# Altium PCB STM32.PcbDoc (part 7 of 10)
Units mil, origin at the board's own origin, x right, y up, seen from the top; angles counter-clockwise.
Board outline 3925 x 3925 mil, 2 copper layers (Top Layer, Bottom Layer); 152 components, 142 nets, 670 pads, 189 vias.
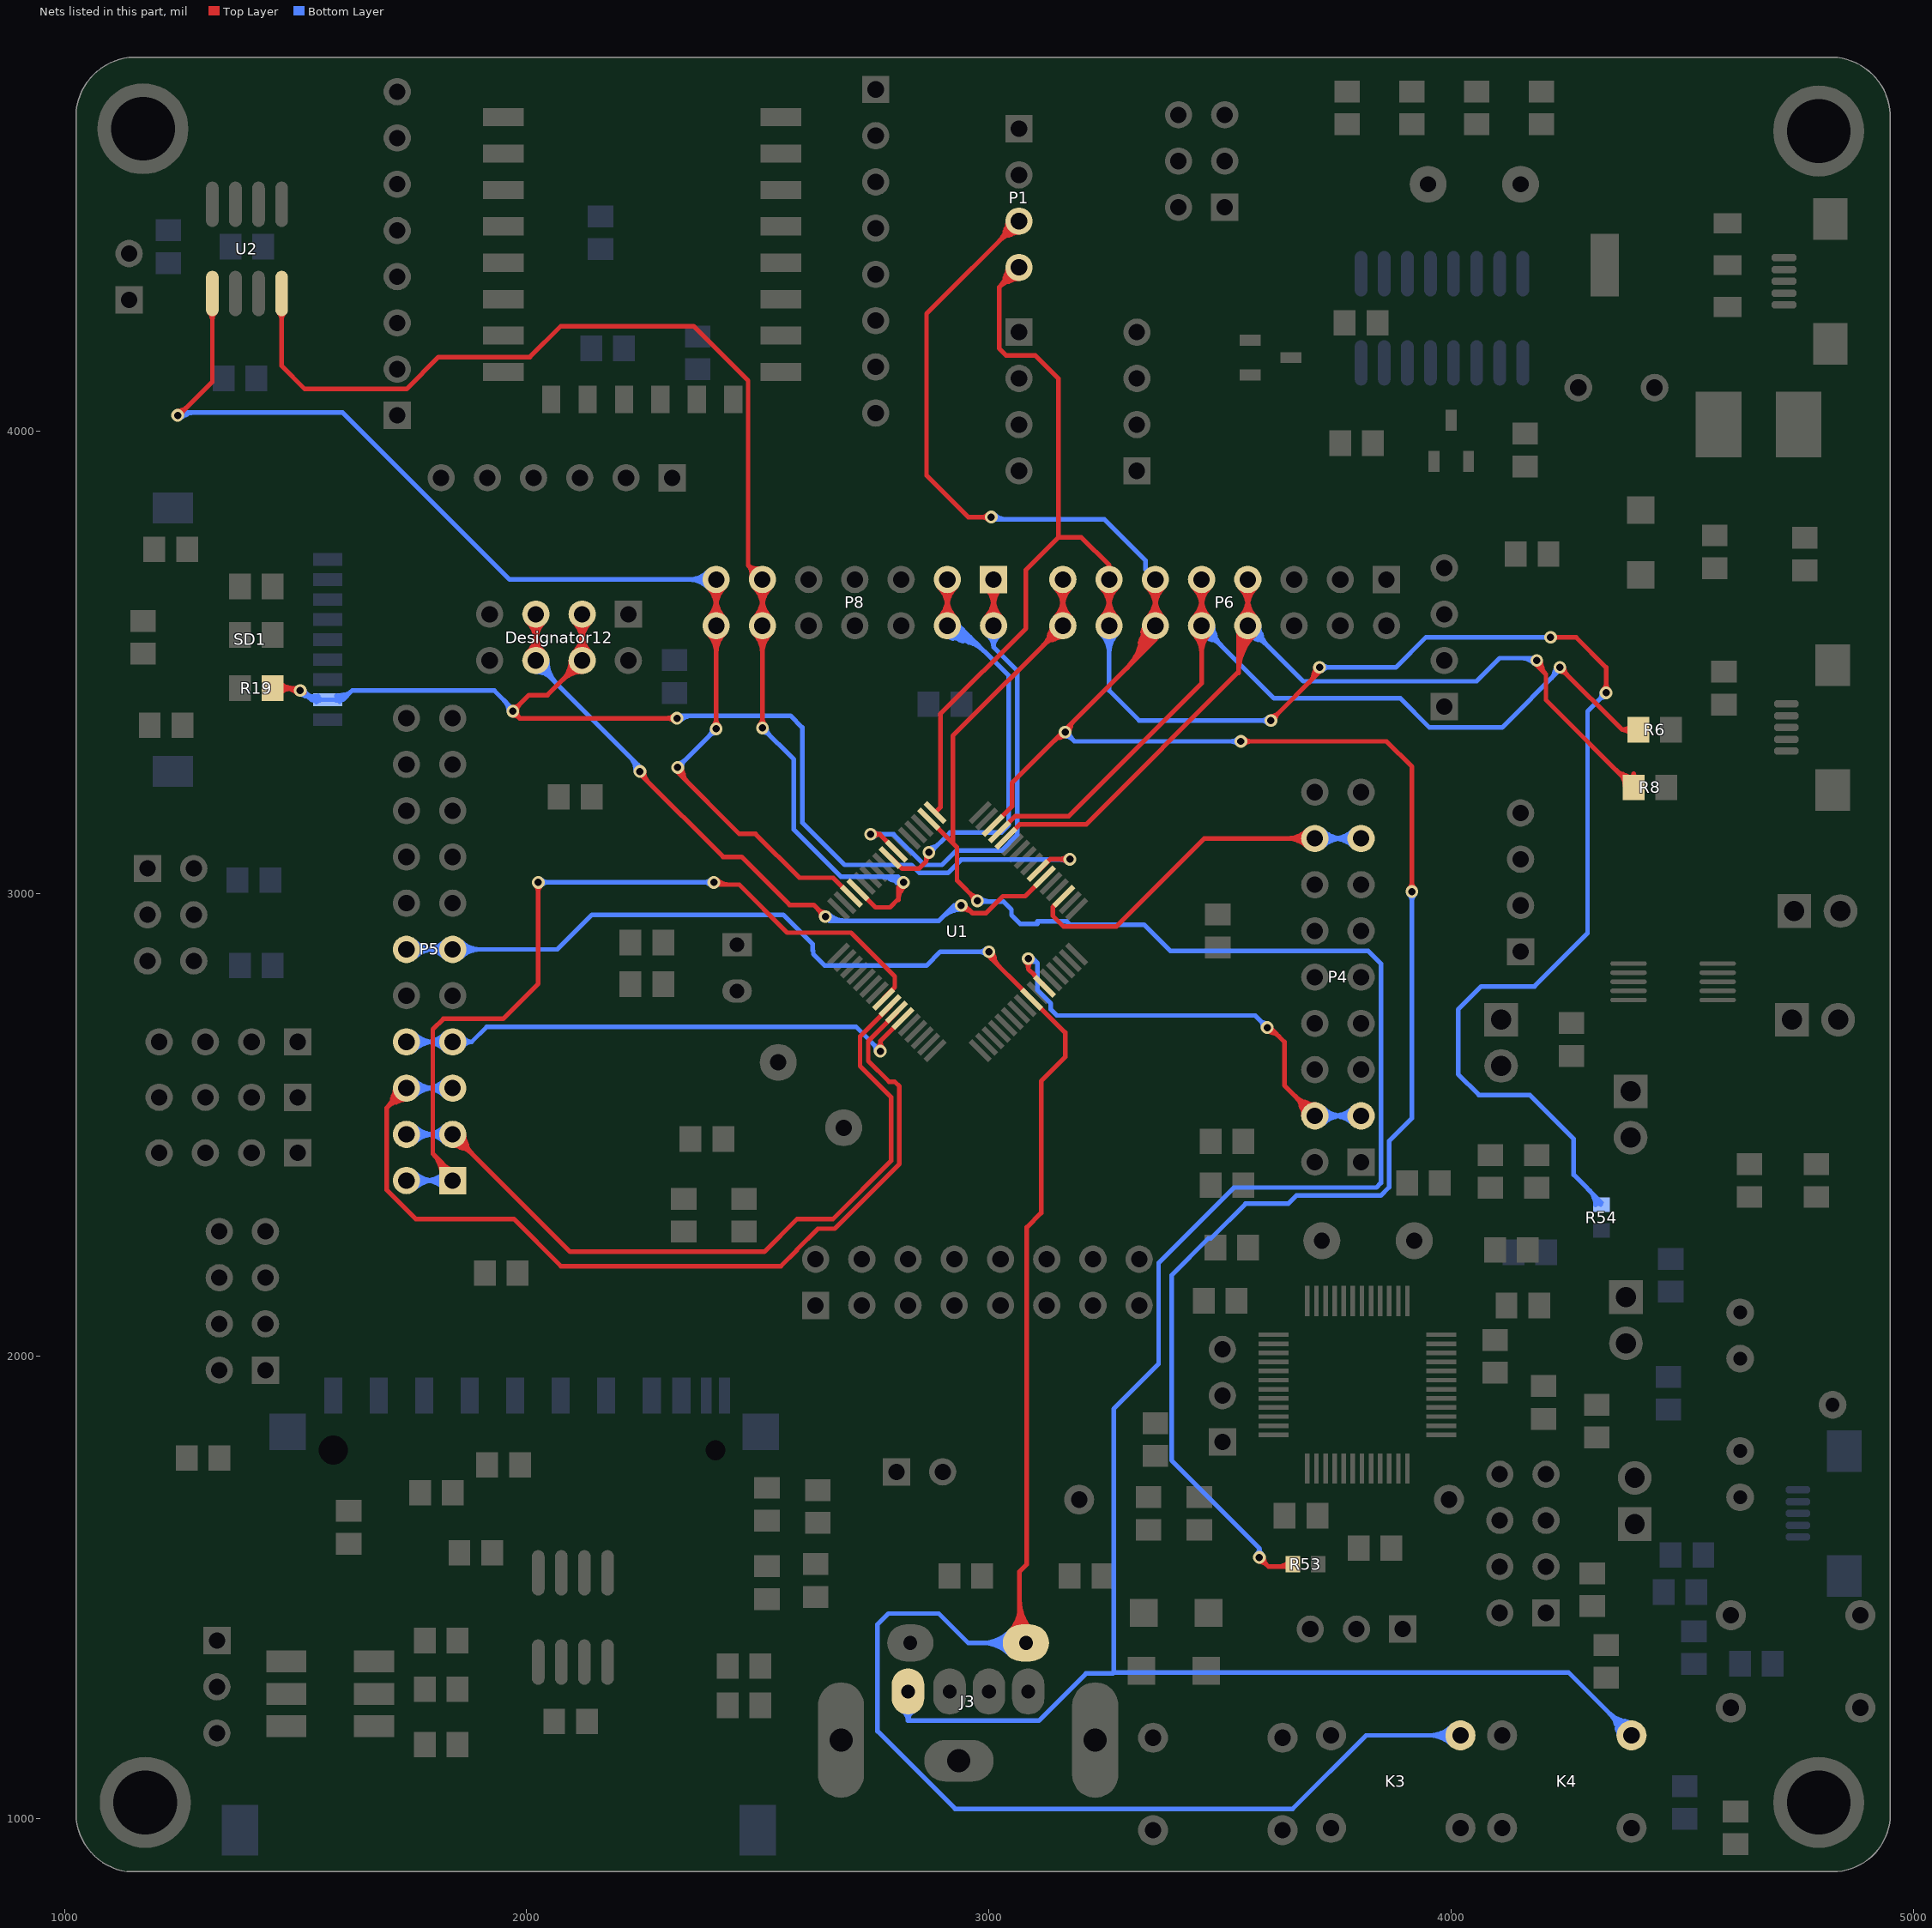
[diagram p7: the nets of this part, all layers, seen from the top]

## Via types
v1: diameter 27.56, hole 15.75, Top Layer to Bottom Layer, tented both sides, 185 vias
v2: diameter 39.37, hole 23.62, Top Layer to Bottom Layer, tented both sides, 3 vias
v3: diameter 39.37, hole 27.56, Top Layer to Bottom Layer, tented both sides, 1 vias

## Nets (pads, with @x,y where several pads share a name; then routed paths per layer and width w, separated by ;. In a path a pad name is that pad's centre, name@x,y a point inside that pad or via, vN(x,y) a via of type N, cw(c..) or ccw(c..) an arc to the next point about the centre after c; other vN are vias at no path point) (continued)
PA11: P6.7 P6.8 R8.1 U1.44 | length 4014.7
  Top Layer w10: U1.44@3036.91,3120.55 3067.1,3150.74 3210.74,3150.74 3540,3480 3540,3580 P6.8@3560,3580 P6.7@3560,3680 ; P6.8@3542.59,3562.73 cw(c3533.49,3553.71) 3544.33,3546.89 cw(c3559.88,3537.11) P6.8@3559.93,3555.47 ; P6.8@3543.79,3561.6 cw(c3529.66,3545.56) 3547.75,3534.18 ; P6.8@3550.4,3569.1 cw(c3537.53,3554.49) 3554.01,3544.12 ; v1@4180,3500 4205,3475 ; v1@4185.67,3506.02 cw(c4171.39,3484.28) 4196.86,3489.56 ; 4371.1,3258.85 cw(c4362,3224.85) R8.1@4395.9,3234.31 ; 3560,3615.07 ccw(c3595.07,3615.07) 3570.27,3590.27 cw(c3595.07,3615.07) 3560,3615.07 ; 3560,3615.07 cw(c3524.93,3615.07) 3549.73,3590.27 ccw(c3524.93,3615.07) 3560,3615.07 ; 3560,3620.79 ccw(c3500.79,3620.79) 3542.66,3662.66 cw(c3500.79,3620.79) 3560,3620.79 ; 3560,3620.79 cw(c3619.21,3620.79) 3577.34,3662.66 ccw(c3619.21,3620.79) 3560,3620.79 ; 3560,3639.21 ccw(c3619.21,3639.21) 3577.34,3597.34 cw(c3619.21,3639.21) 3560,3639.21 ; 3560,3639.21 cw(c3500.79,3639.21) 3542.66,3597.34 ccw(c3500.79,3639.21) 3560,3639.21 ; 3560,3644.93 ccw(c3524.93,3644.93) 3549.73,3669.73 cw(c3524.93,3644.93) 3560,3644.93 ; 3560,3644.93 cw(c3595.07,3644.93) 3570.27,3669.73 ccw(c3595.07,3644.93) 3560,3644.93 ; 4205,3475 cw(c4232.27,3502.28) 4193.76,3504.49 ccw(c4232.27,3502.28) 4205,3475 ; 4205,3475 4205,3419.57 R8.1@4394.57,3230 4394.57,3260 ; 4394.57,3260 ccw(c4403.49,3260) 4400.6,3251.56 cw(c4403.49,3260) 4394.57,3260 ; 4394.57,3260 cw(c4385.64,3260) 4388.54,3251.56 ccw(c4385.64,3260) 4394.57,3260 ; 3540,3478.02 cw(c3654.51,3478.02) 3576.67,3562.01 ccw(c3654.51,3478.02) 3540,3478.02 ; 3540,3500.93 cw(c3633.28,3500.93) 3569.87,3569.34 ccw(c3633.28,3500.93) 3540,3500.93 ; 3540,3523.83 cw(c3612.06,3523.83) 3563.08,3576.68 ccw(c3612.06,3523.83) 3540,3523.83 ; 3540,3546.73 cw(c3590.83,3546.73) 3556.28,3584.01 ccw(c3590.83,3546.73) 3540,3546.73 ; v1@4183.78,3505.07 ccw(c4202.45,3503.99) 4189.23,3490.77 cw(c4202.45,3503.99) v1@4183.78,3505.07 ; 4356.06,3268.51 ccw(c4394.57,3307.02) 4394.57,3252.56 cw(c4394.57,3307.02) 4356.06,3268.51 ; 4365.56,3259.01 cw(c4340.49,3233.94) 4375.95,3233.94 ccw(c4340.49,3233.94) 4365.56,3259.01 ; R8.1@4373.13,3251.44 ccw(c4394.57,3272.88) 4394.57,3242.56 cw(c4394.57,3272.88) R8.1@4373.13,3251.44
  Bottom Layer w10: P6.8@3554.64,3578.9 ccw(c3592.3,3586.61) 3582.35,3549.48 ; P6.8@3560,3580 3680,3460 4055,3460 4105,3510 v1@4185,3510 ; P6.8@3561.1,3585.36 cw(c3553.39,3547.7) 3590.52,3557.65 ; 3584.8,3555.2 ccw(c3560,3530.4) 3560,3565.47 cw(c3560,3530.4) 3584.8,3555.2 ; 3584.8,3555.2 cw(c3609.6,3580) 3574.53,3580 ccw(c3609.6,3580) 3584.8,3555.2 ; 3601.87,3538.13 ccw(c3560,3496.26) 3560,3555.47 cw(c3560,3496.26) 3601.87,3538.13 ; 3601.87,3538.13 cw(c3643.74,3580) 3584.53,3580 ccw(c3643.74,3580) 3601.87,3538.13 ; 4151.73,3510 cw(c4151.73,3471.73) 4178.79,3498.79 ccw(c4151.73,3471.73) 4151.73,3510
  other v1: 4185,3505
PA12: P6.9 P6.10 R6.1 U1.45 | length 3470
  Top Layer w10: U1.45@3022.99,3134.47 3056.74,3168.22 3172.86,3168.22 3460,3455.36 P6.10@3460,3580 P6.9@3460,3680 ; v1@4233.8,3489.76 ccw(c4247.87,3492.64) 4244.15,3478.77 ; v1(4235,3490) 4370,3355 ; v1@4235.24,3491.2 cw(c4232.36,3477.13) 4246.23,3480.85 ; R6.1@4404.57,3355 4370,3355 ; 3460,3520.79 ccw(c3400.79,3520.79) 3442.66,3562.66 cw(c3400.79,3520.79) 3460,3520.79 ; 3460,3520.79 cw(c3519.21,3520.79) 3477.34,3562.66 ccw(c3519.21,3520.79) 3460,3520.79 ; 3460,3544.93 ccw(c3424.93,3544.93) 3449.73,3569.73 cw(c3424.93,3544.93) 3460,3544.93 ; 3460,3544.93 cw(c3495.07,3544.93) 3470.27,3569.73 ccw(c3495.07,3544.93) 3460,3544.93 ; 3460,3615.07 ccw(c3495.07,3615.07) 3470.27,3590.27 cw(c3495.07,3615.07) 3460,3615.07 ; 3460,3615.07 cw(c3424.93,3615.07) 3449.73,3590.27 ccw(c3424.93,3615.07) 3460,3615.07 ; 3460,3620.79 ccw(c3400.79,3620.79) 3442.66,3662.66 cw(c3400.79,3620.79) 3460,3620.79 ; 3460,3620.79 cw(c3519.21,3620.79) 3477.34,3662.66 ccw(c3519.21,3620.79) 3460,3620.79 ; 3460,3639.21 ccw(c3519.21,3639.21) 3477.34,3597.34 cw(c3519.21,3639.21) 3460,3639.21 ; 3460,3639.21 cw(c3400.79,3639.21) 3442.66,3597.34 ccw(c3400.79,3639.21) 3460,3639.21 ; 3460,3644.93 ccw(c3424.93,3644.93) 3449.73,3669.73 cw(c3424.93,3644.93) 3460,3644.93 ; 3460,3644.93 cw(c3495.07,3644.93) 3470.27,3669.73 ccw(c3495.07,3644.93) 3460,3644.93 ; 4249.99,3475.01 ccw(c4235,3460.02) 4235,3481.22 cw(c4235,3460.02) 4249.99,3475.01 ; 4249.99,3475.01 cw(c4264.98,3490) 4243.78,3490 ccw(c4264.98,3490) 4249.99,3475.01 ; 4370,3355 ccw(c4370,3377.78) 4389.02,3365.25 cw(c4370,3377.78) 4370,3355 ; 4370,3355 cw(c4370,3332.23) 4389.02,3344.76 ccw(c4370,3332.23) 4370,3355
  Bottom Layer w10: P6.10@3454.64,3578.9 ccw(c3492.3,3586.61) 3482.35,3549.48 ; P6.10@3460,3580 3617,3423 3890,3423 3953,3360 4110,3360 v1@4237.5,3487.5 ; P6.10@3461.1,3585.36 cw(c3453.39,3547.7) 3490.52,3557.65 ; 4223.09,3478.31 cw(c4241.52,3473.37) v1@4234.55,3491.14 ; 3484.8,3555.2 ccw(c3460,3530.4) 3460,3565.47 cw(c3460,3530.4) 3484.8,3555.2 ; 3484.8,3555.2 cw(c3509.6,3580) 3474.53,3580 ccw(c3509.6,3580) 3484.8,3555.2 ; 3501.87,3538.13 ccw(c3460,3496.26) 3460,3555.47 cw(c3460,3496.26) 3501.87,3538.13 ; 3501.87,3538.13 cw(c3543.74,3580) 3484.53,3580 ccw(c3543.74,3580) 3501.87,3538.13 ; 4216.48,3466.48 ccw(c4192.95,3490) 4226.22,3490 cw(c4192.95,3490) 4216.48,3466.48
PA13: P1.3 P6.11 P6.12 R53.1 U1.46 | length 7716.4
  Top Layer w10: v1(3005,3815) 2955,3815 2865,3905 2865,4255 P1.3@3065,4455 ; U1.46@3009.07,3148.39 3050,3189.32 3050,3240 3360,3550 ; 3034.48,4432.65 cw(c3071.61,4422.7) P1.3@3063.9,4460.36 ; 3042.65,4424.48 ccw(c3032.7,4461.61) P1.3@3070.36,4453.9 ; 3153.31,3338.09 ccw(c3148.37,3356.52) v1@3166.14,3349.55 ; v1@3165.45,3348.86 ccw(c3158.48,3366.63) 3176.91,3361.69 ; 3321.59,3520.38 cw(c3407.44,3500.39) P6.12@3362.32,3576.11 ; 3326.92,3543.27 cw(c3390.74,3528.4) P6.12@3357.2,3584.7 ; 3330.4,3523.75 cw(c3395.16,3506.39) P6.12@3366.26,3566.89 ; 3332.25,3566.16 cw(c3374.05,3556.42) P6.12@3352.08,3593.29 ; 3336.02,3544.71 cw(c3382.85,3532.17) P6.12@3361.95,3575.91 ; P6.12@3338.76,3567.74 cw(c3300.41,3545.59) 3343.18,3534.13 ; 3346.99,3548.35 cw(c3371.52,3541.78) P6.12@3364.19,3566.09 ; P6.11@3360,3680 P6.12@3360,3580 3360,3550 ; v1@3540,3335 v1(3545,3330) 3860,3330 3915,3275 v1(3915,3005) ; v1@3583.8,1564.76 ccw(c3597.87,1567.64) 3594.15,1553.77 ; v1(3585,1565) 3605,1545 R53.1@3657.44,1545 ; v1@3585.24,1566.2 cw(c3582.36,1552.13) 3596.23,1555.85 ; 2983.8,3815 ccw(c2983.8,3836.2) 2998.79,3821.21 cw(c2983.8,3836.2) 2983.8,3815 ; 2983.8,3815 cw(c2983.8,3793.8) 2998.79,3808.79 ccw(c2983.8,3793.8) 2983.8,3815 ; 3023.13,4413.13 ccw(c2981.26,4455) 3040.47,4455 cw(c2981.26,4455) 3023.13,4413.13 ; 3023.13,4413.13 cw(c3065,4371.26) 3065,4430.47 ccw(c3065,4371.26) 3023.13,4413.13 ; 3040.2,4430.2 ccw(c3015.4,4455) 3050.47,4455 cw(c3015.4,4455) 3040.2,4430.2 ; 3040.2,4430.2 cw(c3065,4405.4) 3065,4440.47 ccw(c3065,4405.4) 3040.2,4430.2 ; 3360,3550 ccw(c3353.92,3550) 3355.13,3555.96 cw(c3353.92,3550) 3360,3550 ; 3360,3550 cw(c3366.08,3550) 3364.87,3555.96 ccw(c3366.08,3550) 3360,3550 ; 3360,3615.07 ccw(c3395.07,3615.07) 3370.27,3590.27 cw(c3395.07,3615.07) 3360,3615.07 ; 3360,3615.07 cw(c3324.93,3615.07) 3349.73,3590.27 ccw(c3324.93,3615.07) 3360,3615.07 ; 3360,3620.79 ccw(c3300.79,3620.79) 3342.66,3662.66 cw(c3300.79,3620.79) 3360,3620.79 ; 3360,3620.79 cw(c3419.21,3620.79) 3377.34,3662.66 ccw(c3419.21,3620.79) 3360,3620.79 ; 3360,3639.21 ccw(c3419.21,3639.21) 3377.34,3597.34 cw(c3419.21,3639.21) 3360,3639.21 ; 3360,3639.21 cw(c3300.79,3639.21) 3342.66,3597.34 ccw(c3300.79,3639.21) 3360,3639.21 ; 3360,3644.93 ccw(c3324.93,3644.93) 3349.73,3669.73 cw(c3324.93,3644.93) 3360,3644.93 ; 3360,3644.93 cw(c3395.07,3644.93) 3370.27,3669.73 ccw(c3395.07,3644.93) 3360,3644.93 ; 3566.2,3330 ccw(c3566.2,3308.8) 3551.21,3323.79 cw(c3566.2,3308.8) 3566.2,3330 ; 3566.2,3330 cw(c3566.2,3351.2) 3551.21,3336.21 ccw(c3566.2,3351.2) 3566.2,3330 ; 3599.99,1550.01 ccw(c3585,1535.02) 3585,1556.22 cw(c3585,1535.02) 3599.99,1550.01 ; 3599.99,1550.01 cw(c3614.98,1565) 3593.78,1565 ccw(c3614.98,1565) 3599.99,1550.01 ; 3915,3026.2 ccw(c3936.2,3026.2) 3921.21,3011.21 cw(c3936.2,3026.2) 3915,3026.2 ; 3915,3026.2 cw(c3893.8,3026.2) 3908.79,3011.21 ccw(c3893.8,3026.2) 3915,3026.2 ; 3141.48,3331.48 cw(c3165,3307.95) 3165,3341.22 ccw(c3165,3307.95) 3141.48,3331.48 ; v1@3173.78,3350 cw(c3207.05,3350) 3183.52,3373.52 ccw(c3207.05,3350) v1@3173.78,3350 ; 3296.92,3486.92 ccw(c3203.83,3580) 3335.47,3580 cw(c3203.83,3580) 3296.92,3486.92 ; 3313.99,3503.99 ccw(c3237.97,3580) 3345.47,3580 cw(c3237.97,3580) 3313.99,3503.99 ; 3331.06,3521.06 ccw(c3272.12,3580) 3355.47,3580 cw(c3272.12,3580) 3331.06,3521.06 ; 3348.13,3538.13 ccw(c3306.26,3580) 3365.47,3580 cw(c3306.26,3580) 3348.13,3538.13 ; 3624.17,1545 ccw(c3624.17,1581.3) 3649.84,1555.63 cw(c3624.17,1581.3) 3624.17,1545 ; 3638.81,1545 cw(c3638.81,1529.4) 3649.84,1540.43 ccw(c3638.81,1529.4) 3638.81,1545
  Bottom Layer w10: v1@2999,3810 3249.97,3810 3338.4,3721.58 3338.4,3701.6 P6.11@3360,3680 ; v1(3165,3350) 3185,3330 v1(3545,3330) ; v1(3585,1565) 3585,1585 ; v1(3915,3005) 3915,2515 3865.48,2465.48 3865.48,2365.48 3847.52,2347.52 3665,2347.52 3647.48,2330 3555,2330 3480,2255 3475,2255 3395,2175 3395,1775 3585,1585 ; 3179.99,3335.01 ccw(c3165,3320.02) 3165,3341.22 cw(c3165,3320.02) 3179.99,3335.01 ; 3179.99,3335.01 cw(c3194.98,3350) 3173.78,3350 ccw(c3194.98,3350) 3179.99,3335.01 ; 3523.8,3330 ccw(c3523.8,3351.2) 3538.79,3336.21 cw(c3523.8,3351.2) 3523.8,3330 ; 3523.8,3330 cw(c3523.8,3308.8) 3538.79,3323.79 ccw(c3523.8,3308.8) 3523.8,3330 ; 3585,1585 ccw(c3603.39,1585) 3590.94,1571.46 cw(c3603.39,1585) 3585,1585 ; 3585,1585 cw(c3566.61,1585) 3579.06,1571.46 ccw(c3566.61,1585) 3585,1585 ; 3915,2983.8 ccw(c3893.8,2983.8) 3908.79,2998.79 cw(c3893.8,2983.8) 3915,2983.8 ; 3915,2983.8 cw(c3936.2,2983.8) 3921.21,2998.79 ccw(c3936.2,2983.8) 3915,2983.8 ; v1@3011.21,3821.21 ccw(c3038.27,3848.27) 3038.27,3810 cw(c3038.27,3848.27) v1@3011.21,3821.21
PA14: P1.4 P6.13 P6.14 R54.1 U1.49 | length 6452.8
  Top Layer w10: U1.49@2883.79,3176.23 2895,3187.43 2895,3389.04 3080.18,3574.22 3080.18,3701.18 3150,3771 ; 3034.48,4332.65 cw(c3071.61,4322.7) P1.4@3063.9,4360.36 ; 3042.65,4324.48 ccw(c3032.7,4361.61) P1.4@3070.36,4353.9 ; P1.4@3065,4355 3022,4312 3022,4180 3037,4165 3100,4165 3150,4115 3150,3771 ; P6.14@3260,3580 P6.13@3260,3680 3260,3710.96 ; v1@3608.8,3375.24 cw(c3622.87,3372.36) 3619.15,3386.23 ; v1(3610,3375) 3715,3480 v1(3715,3490) ; v1@3610.24,3373.8 ccw(c3607.36,3387.87) 3621.23,3384.15 ; 3702.41,3475.77 cw(c3726.33,3469.36) v1@3714.41,3491.07 ; v1(4215,3555) 4270,3555 4335,3490 v1(4335,3435) ; 3023.13,4313.13 ccw(c2981.26,4355) 3040.47,4355 cw(c2981.26,4355) 3023.13,4313.13 ; 3023.13,4313.13 cw(c3065,4271.26) 3065,4330.47 ccw(c3065,4271.26) 3023.13,4313.13 ; 3040.2,4330.2 ccw(c3015.4,4355) 3050.47,4355 cw(c3015.4,4355) 3040.2,4330.2 ; 3040.2,4330.2 cw(c3065,4305.4) 3065,4340.47 ccw(c3065,4305.4) 3040.2,4330.2 ; 3150,3771 3199.96,3771 3260,3710.96 ; 3260,3615.07 ccw(c3295.07,3615.07) 3270.27,3590.27 cw(c3295.07,3615.07) 3260,3615.07 ; 3260,3615.07 cw(c3224.93,3615.07) 3249.73,3590.27 ccw(c3224.93,3615.07) 3260,3615.07 ; 3260,3620.79 ccw(c3200.79,3620.79) 3242.66,3662.66 cw(c3200.79,3620.79) 3260,3620.79 ; 3260,3620.79 cw(c3319.21,3620.79) 3277.34,3662.66 ccw(c3319.21,3620.79) 3260,3620.79 ; 3260,3639.21 ccw(c3319.21,3639.21) 3277.34,3597.34 cw(c3319.21,3639.21) 3260,3639.21 ; 3260,3639.21 cw(c3200.79,3639.21) 3242.66,3597.34 ccw(c3200.79,3639.21) 3260,3639.21 ; 3260,3644.93 ccw(c3224.93,3644.93) 3249.73,3669.73 cw(c3224.93,3644.93) 3260,3644.93 ; 3260,3644.93 cw(c3295.07,3644.93) 3270.27,3669.73 ccw(c3295.07,3644.93) 3260,3644.93 ; 3260,3710.96 ccw(c3267.28,3710.96) 3265.61,3703.88 cw(c3267.28,3710.96) 3260,3710.96 ; 3260,3710.96 cw(c3252.72,3710.96) 3254.39,3703.88 ccw(c3252.72,3710.96) 3260,3710.96 ; 3624.99,3389.99 ccw(c3639.98,3375) 3618.78,3375 cw(c3639.98,3375) 3624.99,3389.99 ; 3624.99,3389.99 cw(c3610,3404.98) 3610,3383.78 ccw(c3610,3404.98) 3624.99,3389.99 ; 4335,3456.2 ccw(c4356.2,3456.2) 4341.21,3441.21 cw(c4356.2,3456.2) 4335,3456.2 ; 4335,3456.2 cw(c4313.8,3456.2) 4328.79,3441.21 ccw(c4313.8,3456.2) 4335,3456.2 ; 3692.94,3457.94 ccw(c3660.88,3490) 3706.22,3490 cw(c3660.88,3490) 3692.94,3457.94 ; 3710.01,3475.01 ccw(c3695.02,3490) 3716.22,3490 cw(c3695.02,3490) 3710.01,3475.01
  Bottom Layer w10: P6.14@3260,3580 3260,3440 3325,3375 v1(3610,3375) ; v1(3715,3490) 3880,3490 3945,3555 v1(4215,3555) ; 4307.15,2346.7 ccw(c4333.97,2353.88) R54.1@4323.32,2328.25 ; R54.1@4325,2332.56 4265,2392.56 4265,2470 4170,2565 4060,2565 4015,2610 4015,2750 4065,2800 4180,2800 4295,2915 4295,3395 v1(4335,3435) ; 3260,3520.79 ccw(c3200.79,3520.79) 3242.66,3562.66 cw(c3200.79,3520.79) 3260,3520.79 ; 3260,3520.79 cw(c3319.21,3520.79) 3277.34,3562.66 ccw(c3319.21,3520.79) 3260,3520.79 ; 3260,3544.93 ccw(c3224.93,3544.93) 3249.73,3569.73 cw(c3224.93,3544.93) 3260,3544.93 ; 3260,3544.93 cw(c3295.07,3544.93) 3270.27,3569.73 ccw(c3295.07,3544.93) 3260,3544.93 ; 3588.8,3375 ccw(c3588.8,3396.2) 3603.79,3381.21 cw(c3588.8,3396.2) 3588.8,3375 ; 3588.8,3375 cw(c3588.8,3353.8) 3603.79,3368.79 ccw(c3588.8,3353.8) 3588.8,3375 ; 3736.2,3490 ccw(c3736.2,3468.8) 3721.21,3483.79 cw(c3736.2,3468.8) 3736.2,3490 ; 3736.2,3490 cw(c3736.2,3511.2) 3721.21,3496.21 ccw(c3736.2,3511.2) 3736.2,3490 ; 4320.01,3420.01 ccw(c4305.02,3435) 4326.22,3435 cw(c4305.02,3435) 4320.01,3420.01 ; 4320.01,3420.01 cw(c4335,3405.02) 4335,3426.22 ccw(c4335,3405.02) 4320.01,3420.01 ; 4299.76,2357.8 cw(c4269.51,2327.56) 4312.28,2327.56 ccw(c4269.51,2327.56) 4299.76,2357.8
PA15: J3.5 K4.2 P6.15 P6.16 U1.50 | length 7177.1
  Top Layer w6: U1.50@2869.87,3162.31 U1.50@2890.18,3142
  Top Layer w10: U1.50@2890.18,3142 2920,3112.18 ; v1@2966.22,2985 ccw(c2945.02,2985) 2960.01,2999.99 ccw(c2975,3014.98) v1@2975,2993.78 ; v1(2975,2985) 2931,3029 2931,3101.18 2920,3112.18 ; 3129.48,3557.65 cw(c3166.61,3547.7) P6.16@3158.9,3585.36 ; 3137.65,3549.48 ccw(c3127.7,3586.61) P6.16@3165.36,3578.9 ; P6.15@3160,3680 P6.16@3160,3580 2921.88,3341.88 2921.88,3160 2921.73,3159.85 2921.73,3113.91 2920,3112.18 ; 3118.13,3538.13 ccw(c3076.26,3580) 3135.47,3580 cw(c3076.26,3580) 3118.13,3538.13 ; 3118.13,3538.13 cw(c3160,3496.26) 3160,3555.47 ccw(c3160,3496.26) 3118.13,3538.13 ; 3135.2,3555.2 ccw(c3110.4,3580) 3145.47,3580 cw(c3110.4,3580) 3135.2,3555.2 ; 3135.2,3555.2 cw(c3160,3530.4) 3160,3565.47 ccw(c3160,3530.4) 3135.2,3555.2 ; 3160,3615.07 ccw(c3195.07,3615.07) 3170.27,3590.27 cw(c3195.07,3615.07) 3160,3615.07 ; 3160,3615.07 cw(c3124.93,3615.07) 3149.73,3590.27 ccw(c3124.93,3615.07) 3160,3615.07 ; 3160,3620.79 ccw(c3100.79,3620.79) 3142.66,3662.66 cw(c3100.79,3620.79) 3160,3620.79 ; 3160,3620.79 cw(c3219.21,3620.79) 3177.34,3662.66 ccw(c3219.21,3620.79) 3160,3620.79 ; 3160,3639.21 ccw(c3219.21,3639.21) 3177.34,3597.34 cw(c3219.21,3639.21) 3160,3639.21 ; 3160,3639.21 cw(c3100.79,3639.21) 3142.66,3597.34 ccw(c3100.79,3639.21) 3160,3639.21 ; 3160,3644.93 ccw(c3124.93,3644.93) 3149.73,3669.73 cw(c3124.93,3644.93) 3160,3644.93 ; 3160,3644.93 cw(c3195.07,3644.93) 3170.27,3669.73 ccw(c3195.07,3644.93) 3160,3644.93
  Bottom Layer w10: J3.5@2825,1275 2825,1212 ; v1(2975,2985) 2976.26,2983.74 3031.26,2983.74 3048.74,2966.26 3048.74,2954.12 3067.86,2935 3105,2935 ; v1@2981.21,2978.79 cw(c2993.15,2966.85) 2993.15,2983.74 ; v1@2981.21,2991.21 ccw(c2999.24,3009.24) 2999.24,2983.74 ; 3105,2940.52 3168.26,2940.52 3175.22,2933.56 3335.44,2933.56 3392,2877 3820,2877 3848,2849 3848,2375 3838,2365 3530,2365 3367.01,2202.01 3367.01,1983.28 3270,1886.27 3270,1316 4254,1316 K4.2@4390,1180 ; 3268,1314 3210,1314 3108,1212 2825,1212 ; 4354.22,1210.82 ccw(c4398.76,1222.75) K4.2@4389.51,1177.58 ; 4358.41,1195.19 ccw(c4395.13,1205.02) K4.2@4387.5,1167.78 ; 4359.19,1215.78 cw(c4347.25,1171.25) K4.2@4392.42,1180.5 ; 4374.82,1211.6 cw(c4364.98,1174.88) K4.2@4402.22,1182.5 ; 2825,1212 ccw(c2801.6,1212) 2811.85,1233.03 cw(c2801.6,1212) 2825,1212 ; 2825,1212 cw(c2848.4,1212) 2838.15,1233.03 ccw(c2848.4,1212) 2825,1212 ; 4343.01,1226.99 ccw(c4390,1273.98) 4390,1207.53 cw(c4390,1273.98) 4343.01,1226.99 ; 4343.01,1226.99 cw(c4296.02,1180) 4362.47,1180 ccw(c4296.02,1180) 4343.01,1226.99 ; 4360.08,1209.92 ccw(c4390,1239.84) 4390,1197.53 cw(c4390,1239.84) 4360.08,1209.92 ; 4360.08,1209.92 cw(c4330.16,1180) 4372.47,1180 ccw(c4330.16,1180) 4360.08,1209.92
PB1: P4.3 P4.4 U1.27 | length 2242.4
  Top Layer w6: U1.27@3120.42,2800.4 U1.27@3117.86,2800.4 ; U1.27@3117.86,2800.4 3117.86,2807.49 U1.27@3117.86,2800.4
  Top Layer w10: v1@3085,2862 3085,2837.53 3098.59,2823.94 ; v1@3600.88,2710.52 ccw(c3619.41,2718.41) 3614.2,2698.95 ; v1(3602,2711) 3608,2711 3639,2680 3639,2586 P4.4@3705,2520 ; 3674.48,2542.35 ccw(c3711.61,2552.3) P4.4@3703.9,2514.64 ; 3682.65,2550.52 cw(c3672.7,2513.39) P4.4@3710.36,2521.1 ; 3085,2838.8 ccw(c3063.8,2838.8) 3078.79,2853.79 cw(c3063.8,2838.8) 3085,2838.8 ; 3085,2838.8 cw(c3106.2,2838.8) 3091.21,2853.79 ccw(c3106.2,2838.8) 3085,2838.8 ; 3663.13,2561.87 ccw(c3705,2603.74) 3705,2544.53 cw(c3705,2603.74) 3663.13,2561.87 ; 3663.13,2561.87 cw(c3621.26,2520) 3680.47,2520 ccw(c3621.26,2520) 3663.13,2561.87 ; 3680.2,2544.8 ccw(c3705,2569.6) 3705,2534.53 cw(c3705,2569.6) 3680.2,2544.8 ; 3680.2,2544.8 cw(c3655.4,2520) 3690.47,2520 ccw(c3655.4,2520) 3680.2,2544.8 ; v1@3602,2702.22 cw(c3602,2666.54) 3627.23,2691.77 ccw(c3602,2666.54) v1@3602,2702.22
  Bottom Layer w10: v1(3602,2711) 3576,2737 3146.74,2737 3133.74,2750 3133.74,2763 3105,2791.74 3105,2850 ; P4.4@3705,2520 P4.3@3805,2520 ; v1@3093,2862 3085,2862 v1@3093,2862 ; v1@3093,2862 3105,2850 ; 3105,2850 ccw(c3095.57,2840.57) 3089.19,2852.29 cw(c3095.57,2840.57) 3105,2850 ; 3587.01,2725.99 ccw(c3602,2740.98) 3602,2719.78 cw(c3602,2740.98) 3587.01,2725.99 ; 3587.01,2725.99 cw(c3572.02,2711) 3593.22,2711 ccw(c3572.02,2711) 3587.01,2725.99 ; 3740.07,2520 ccw(c3740.07,2484.93) 3715.27,2509.73 cw(c3740.07,2484.93) 3740.07,2520 ; 3740.07,2520 cw(c3740.07,2555.07) 3715.27,2530.27 ccw(c3740.07,2555.07) 3740.07,2520 ; 3745.79,2520 ccw(c3745.79,2579.21) 3787.66,2537.34 cw(c3745.79,2579.21) 3745.79,2520 ; 3745.79,2520 cw(c3745.79,2460.79) 3787.66,2502.66 ccw(c3745.79,2460.79) 3745.79,2520 ; 3764.21,2520 ccw(c3764.21,2460.79) 3722.34,2502.66 cw(c3764.21,2460.79) 3764.21,2520 ; 3764.21,2520 cw(c3764.21,2579.21) 3722.34,2537.34 ccw(c3764.21,2579.21) 3764.21,2520 ; 3769.93,2520 ccw(c3769.93,2555.07) 3794.73,2530.27 cw(c3769.93,2555.07) 3769.93,2520 ; 3769.93,2520 cw(c3769.93,2484.93) 3794.73,2509.73 ccw(c3769.93,2484.93) 3769.93,2520
  other v1: 3085,2860
PB3: P8.1 P8.2 U1.55 | length 1856.8
  Top Layer w10: v1(2744,3129) 2763.99,3129 ; U1.55@2800.28,3092.71 2763.99,3129 ; P8.2@3010,3580 P8.1@3010,3680 ; 2763.99,3129 ccw(c2763.99,3110.64) 2750.47,3123.06 cw(c2763.99,3110.64) 2763.99,3129 ; 2763.99,3129 cw(c2763.99,3147.36) 2750.47,3134.94 ccw(c2763.99,3147.36) 2763.99,3129 ; 3010,3615.07 ccw(c3045.07,3615.07) 3020.27,3590.27 cw(c3045.07,3615.07) 3010,3615.07 ; 3010,3615.07 cw(c2974.93,3615.07) 2999.73,3590.27 ccw(c2974.93,3615.07) 3010,3615.07 ; 3010,3620.79 ccw(c2950.79,3620.79) 2992.66,3662.66 cw(c2950.79,3620.79) 3010,3620.79 ; 3010,3620.79 cw(c3069.21,3620.79) 3027.34,3662.66 ccw(c3069.21,3620.79) 3010,3620.79 ; 3010,3639.21 ccw(c3069.21,3639.21) 3027.34,3597.34 cw(c3069.21,3639.21) 3010,3639.21 ; 3010,3639.21 cw(c2950.79,3639.21) 2992.66,3597.34 ccw(c2950.79,3639.21) 3010,3639.21 ; 3010,3644.93 ccw(c2974.93,3644.93) 2999.73,3669.73 cw(c2974.93,3644.93) 3010,3644.93 ; 3010,3644.93 cw(c3045.07,3644.93) 3020.27,3669.73 ccw(c3045.07,3644.93) 3010,3644.93
  Bottom Layer w10: v1(2744,3129) 2793.74,3129 2860,3062.74 2898,3062.74 2929,3093.74 3027,3093.74 3061,3127.74 3061,3483 3010,3534 ; P8.2@3010,3580 3010,3534 ; 2765.2,3129 ccw(c2765.2,3107.8) 2750.21,3122.79 cw(c2765.2,3107.8) 2765.2,3129 ; 2765.2,3129 cw(c2765.2,3150.2) 2750.21,3135.21 ccw(c2765.2,3150.2) 2765.2,3129 ; 3010,3534 ccw(c2979.13,3534) 2996.33,3559.63 cw(c2979.13,3534) 3010,3534 ; 3010,3534 cw(c3040.87,3534) 3023.67,3559.63 ccw(c3040.87,3534) 3010,3534
PB4: P8.3 P8.4 U1.56 | length 2422.5
  Top Layer w10: U1.56@2786.36,3078.79 2788.06,3078.79 2812.08,3054.77 2848.23,3054.77 2864,3070.55 v1@2864,3089 ; P8.4@2910,3580 P8.3@2910,3680 ; v1@2864,3089 2872,3089 v1@2864,3089 ; 2910,3615.07 ccw(c2945.07,3615.07) 2920.27,3590.27 cw(c2945.07,3615.07) 2910,3615.07 ; 2910,3615.07 cw(c2874.93,3615.07) 2899.73,3590.27 ccw(c2874.93,3615.07) 2910,3615.07 ; 2910,3620.79 ccw(c2850.79,3620.79) 2892.66,3662.66 cw(c2850.79,3620.79) 2910,3620.79 ; 2910,3620.79 cw(c2969.21,3620.79) 2927.34,3662.66 ccw(c2969.21,3620.79) 2910,3620.79 ; 2910,3639.21 ccw(c2969.21,3639.21) 2927.34,3597.34 cw(c2969.21,3639.21) 2910,3639.21 ; 2910,3639.21 cw(c2850.79,3639.21) 2892.66,3597.34 ccw(c2850.79,3639.21) 2910,3639.21 ; 2910,3644.93 ccw(c2874.93,3644.93) 2899.73,3669.73 cw(c2874.93,3644.93) 2910,3644.93 ; 2910,3644.93 cw(c2945.07,3644.93) 2920.27,3669.73 ccw(c2945.07,3644.93) 2910,3644.93 ; 2864,3069.64 cw(c2876.63,3069.64) 2872.72,3081.65 ccw(c2876.63,3069.64) 2864,3069.64
  Bottom Layer w10: v1@2868.84,3090.37 cw(c2885.1,3085.14) 2880.68,3101.64 ; v1@2872,3089 2915.67,3132.67 3026.67,3132.67 3043,3149 3043,3472 2935,3580 P8.4@2910,3580 ; P8.4@2896.3,3572.81 ccw(c2932.29,3591.69) 2922.13,3552.34 ; P8.4@2905.15,3577.46 ccw(c2959.22,3605.82) 2943.96,3546.71 ; P8.4@2914.01,3582.1 ccw(c2986.14,3619.95) 2965.79,3541.08 ; P8.4@2914.2,3581.7 ccw(c2953.3,3597.56) 2942.38,3556.8 ; P8.4@2923.46,3585.46 ccw(c2976.63,3607.02) 2961.78,3551.6 ; P8.4@2924.29,3582.6 ccw(c2942.49,3585.92) 2937.7,3568.05 ; v1@2870,3098.78 ccw(c2870,3127.22) 2890.11,3107.11 cw(c2870,3127.22) v1@2870,3098.78 ; v1@2878.78,3090 cw(c2892.73,3090) 2882.87,3099.87 ccw(c2892.73,3090) v1@2878.78,3090 ; P8.4@2910,3555.47 cw(c2910,3435.9) 2994.55,3520.45 ccw(c2910,3435.9) P8.4@2910,3555.47 ; P8.4@2910,3565.47 cw(c2910,3470.04) 2977.48,3537.52 ccw(c2910,3470.04) P8.4@2910,3565.47 ; P8.4@2910,3575.47 cw(c2910,3504.19) 2960.41,3554.59 ccw(c2910,3504.19) P8.4@2910,3575.47 ; P8.4@2910,3585.47 cw(c2910,3538.33) 2943.34,3571.66 ccw(c2910,3538.33) P8.4@2910,3585.47
  other v1: 2870,3090
PB8: P8.11 P8.12 U1.61 U2.4 | length 4406.8
  Top Layer w10: U2.4@1470,4298.54 1470,4142 1520,4092 1740,4092 1809,4161 2007,4161 2074,4228 2361,4228 2479,4110 2479,3711 ; 2485.78,3699.2 ccw(c2529.3,3700.37) P8.11@2499.36,3668.77 ; 2490.8,3704.22 cw(c2489.63,3660.7) P8.11@2521.23,3690.64 ; v1(2510,3359) P8.12@2510,3580 P8.11@2510,3680 2479,3711 ; U1.61@2716.76,3009.19 2755,2970.95 2785.95,2970.95 2804,2989 2804,3014 ; v1@2808.38,3019.23 cw(c2799.74,3011.7) 2808.46,3004.26 ; v1(2815,3025) 2804,3014 ; 1470,4241.92 ccw(c1448.8,4241.92) 1463.79,4256.9 cw(c1448.8,4241.92) 1470,4241.92 ; 1470,4241.92 cw(c1491.2,4241.92) 1476.21,4256.9 ccw(c1491.2,4241.92) 1470,4241.92 ; 2479,3711 ccw(c2498.03,3730.03) 2504.29,3703.85 cw(c2498.03,3730.03) 2479,3711 ; 2479,3711 cw(c2459.97,3691.97) 2486.15,3685.71 ccw(c2459.97,3691.97) 2479,3711 ; 2510,3380.2 ccw(c2531.2,3380.2) 2516.21,3365.21 cw(c2531.2,3380.2) 2510,3380.2 ; 2510,3380.2 cw(c2488.8,3380.2) 2503.79,3365.21 ccw(c2488.8,3380.2) 2510,3380.2 ; 2510,3520.79 ccw(c2450.79,3520.79) 2492.66,3562.66 cw(c2450.79,3520.79) 2510,3520.79 ; 2510,3520.79 cw(c2569.21,3520.79) 2527.34,3562.66 ccw(c2569.21,3520.79) 2510,3520.79 ; 2510,3544.93 ccw(c2474.93,3544.93) 2499.73,3569.73 cw(c2474.93,3544.93) 2510,3544.93 ; 2510,3544.93 cw(c2545.07,3544.93) 2520.27,3569.73 ccw(c2545.07,3544.93) 2510,3544.93 ; 2510,3615.07 ccw(c2545.07,3615.07) 2520.27,3590.27 cw(c2545.07,3615.07) 2510,3615.07 ; 2510,3615.07 cw(c2474.93,3615.07) 2499.73,3590.27 ccw(c2474.93,3615.07) 2510,3615.07 ; 2510,3620.79 ccw(c2450.79,3620.79) 2492.66,3662.66 cw(c2450.79,3620.79) 2510,3620.79 ; 2510,3620.79 cw(c2569.21,3620.79) 2527.34,3662.66 ccw(c2569.21,3620.79) 2510,3620.79 ; 2510,3639.21 ccw(c2569.21,3639.21) 2527.34,3597.34 cw(c2569.21,3639.21) 2510,3639.21 ; 2510,3639.21 cw(c2450.79,3639.21) 2492.66,3597.34 ccw(c2450.79,3639.21) 2510,3639.21 ; 2510,3644.93 ccw(c2474.93,3644.93) 2499.73,3669.73 cw(c2474.93,3644.93) 2510,3644.93 ; 2510,3644.93 cw(c2545.07,3644.93) 2520.27,3669.73 ccw(c2545.07,3644.93) 2510,3644.93 ; 2804,3014 ccw(c2797.36,3020.64) 2806.48,3022.89 cw(c2797.36,3020.64) 2804,3014 ; 2804,3014 cw(c2810.64,3007.36) 2812.89,3016.48 ccw(c2810.64,3007.36) 2804,3014 ; 2804,2987.36 cw(c2840.93,2987.36) 2819.98,3017.77 ccw(c2840.93,2987.36) 2804,2987.36 ; 2804,3006.39 cw(c2827.82,3006.39) 2814.31,3026.01 ccw(c2827.82,3006.39) 2804,3006.39
  Bottom Layer w10: v1(2510,3359) 2578,3291 2578,3139 2680,3037 2803,3037 v1(2815,3025) ; 2785.16,3032.43 ccw(c2797.74,3054.22) v1@2810.53,3032.56 ; 2798.23,3036.04 cw(c2790.04,3021.86) v1@2806.29,3023.9 ; 2799.7,3035.2 ccw(c2808.28,3050.07) v1@2812.73,3033.48 ; 2799.99,3023.87 ccw(c2807.74,3037.29) v1@2815.62,3023.95 ; 2524.99,3344.01 ccw(c2510,3329.02) 2510,3350.22 cw(c2510,3329.02) 2524.99,3344.01 ; 2524.99,3344.01 cw(c2539.98,3359) 2518.78,3359 ccw(c2539.98,3359) 2524.99,3344.01 ; 2764.83,3037 cw(c2764.83,2974.83) 2808.79,3018.79 ccw(c2764.83,2974.83) 2764.83,3037 ; 2788.98,3037 cw(c2788.98,2998.98) 2815.86,3025.86 ccw(c2788.98,2998.98) 2788.98,3037
PB9: P8.13 P8.14 U1.62 U2.1 | length 4271.4
  Top Layer w10: v1@1243.83,4035.33 cw(c1259.34,4030.92) 1255.17,4046.5 ; v1@1253,4041 1320,4108 U2.1@1320,4298.54 ; v1(2326.6,3273.6) 2326.6,3263.4 2460,3130 2495,3130 2590,3035 2663.11,3035 U1.62@2702.84,2995.27 ; v1@2327.19,3274.67 cw(c2315.06,3252.79) 2339.22,3259.27 ; v1(2410,3357) P8.14@2410,3580 P8.13@2410,3680 ; 1320,4241.92 ccw(c1298.8,4241.92) 1313.79,4256.9 cw(c1298.8,4241.92) 1320,4241.92 ; 1320,4241.92 cw(c1341.2,4241.92) 1326.21,4256.9 ccw(c1341.2,4241.92) 1320,4241.92 ; 2410,3378.2 ccw(c2431.2,3378.2) 2416.21,3363.21 cw(c2431.2,3378.2) 2410,3378.2 ; 2410,3378.2 cw(c2388.8,3378.2) 2403.79,3363.21 ccw(c2388.8,3378.2) 2410,3378.2 ; 2410,3520.79 ccw(c2350.79,3520.79) 2392.66,3562.66 cw(c2350.79,3520.79) 2410,3520.79 ; 2410,3520.79 cw(c2469.21,3520.79) 2427.34,3562.66 ccw(c2469.21,3520.79) 2410,3520.79 ; 2410,3544.93 ccw(c2374.93,3544.93) 2399.73,3569.73 cw(c2374.93,3544.93) 2410,3544.93 ; 2410,3544.93 cw(c2445.07,3544.93) 2420.27,3569.73 ccw(c2445.07,3544.93) 2410,3544.93 ; 2410,3615.07 ccw(c2445.07,3615.07) 2420.27,3590.27 cw(c2445.07,3615.07) 2410,3615.07 ; 2410,3615.07 cw(c2374.93,3615.07) 2399.73,3590.27 ccw(c2374.93,3615.07) 2410,3615.07 ; 2410,3620.79 ccw(c2350.79,3620.79) 2392.66,3662.66 cw(c2350.79,3620.79) 2410,3620.79 ; 2410,3620.79 cw(c2469.21,3620.79) 2427.34,3662.66 ccw(c2469.21,3620.79) 2410,3620.79 ; 2410,3639.21 ccw(c2469.21,3639.21) 2427.34,3597.34 cw(c2469.21,3639.21) 2410,3639.21 ; 2410,3639.21 cw(c2350.79,3639.21) 2392.66,3597.34 ccw(c2350.79,3639.21) 2410,3639.21 ; 2410,3644.93 ccw(c2374.93,3644.93) 2399.73,3669.73 cw(c2374.93,3644.93) 2410,3644.93 ; 2410,3644.93 cw(c2445.07,3644.93) 2420.27,3669.73 ccw(c2445.07,3644.93) 2410,3644.93 ; v1@1245,4043.78 ccw(c1245,4069.8) 1263.4,4051.4 cw(c1245,4069.8) v1@1245,4043.78 ; v1@1253.78,4035 cw(c1270.15,4035) 1258.57,4046.57 ccw(c1270.15,4035) v1@1253.78,4035 ; v1@2325.38,3273.6 ccw(c2347.06,3273.6) 2331.73,3258.27 cw(c2347.06,3273.6) v1@2325.38,3273.6 ; v1@2335.38,3273.6 ccw(c2381.2,3273.6) 2348.8,3241.2 cw(c2381.2,3273.6) v1@2335.38,3273.6
  Bottom Layer w10: v1@1252.16,4040.08 ccw(c1260.53,4046.01) 1265.65,4037.13 ; v1@1253,4041 1602,4041 1963,3680 P8.13@2410,3680 ; v1(2326.6,3273.6) v1(2410,3357) ; 2341.59,3288.59 ccw(c2356.58,3273.6) 2335.38,3273.6 cw(c2356.58,3273.6) 2341.59,3288.59 ; 2341.59,3288.59 cw(c2326.6,3303.58) 2326.6,3282.38 ccw(c2326.6,3303.58) 2341.59,3288.59 ; 2350.79,3680 ccw(c2350.79,3739.21) 2392.66,3697.34 cw(c2350.79,3739.21) 2350.79,3680 ; 2350.79,3680 cw(c2350.79,3620.79) 2392.66,3662.66 ccw(c2350.79,3620.79) 2350.79,3680 ; 2374.93,3680 ccw(c2374.93,3715.07) 2399.73,3690.27 cw(c2374.93,3715.07) 2374.93,3680 ; 2374.93,3680 cw(c2374.93,3644.93) 2399.73,3669.73 ccw(c2374.93,3644.93) 2374.93,3680 ; 2395.01,3342.01 ccw(c2380.02,3357) 2401.22,3357 cw(c2380.02,3357) 2395.01,3342.01 ; 2395.01,3342.01 cw(c2410,3327.02) 2410,3348.22 ccw(c2410,3327.02) 2395.01,3342.01 ; v1@1251.21,4028.79 cw(c1280.68,3999.32) 1280.68,4041 ccw(c1280.68,3999.32) v1@1251.21,4028.79
  other v1: 1245,4035
PB14: P4.15 P4.16 U1.35 | length 1721.4
  Top Layer w10: U1.35@3162.18,2995.28 3138.17,2971.26 3138.17,2952.83 3161.5,2929.5 3275.36,2929.5 3276.9,2931.03 ; 3276.93,2931 3277,2931 3466,3120 P4.16@3705,3120 ; 3645.79,3120 ccw(c3645.79,3179.21) 3687.66,3137.34 cw(c3645.79,3179.21) 3645.79,3120 ; 3645.79,3120 cw(c3645.79,3060.79) 3687.66,3102.66 ccw(c3645.79,3060.79) 3645.79,3120 ; 3669.93,3120 ccw(c3669.93,3155.07) 3694.73,3130.27 cw(c3669.93,3155.07) 3669.93,3120 ; 3669.93,3120 cw(c3669.93,3084.93) 3694.73,3109.73 ccw(c3669.93,3084.93) 3669.93,3120 ; 3138.17,2968.34 cw(c3147.36,2968.34) 3145.42,2977.33 ccw(c3147.36,2968.34) 3138.17,2968.34
  Bottom Layer w10: P4.16@3705,3120 P4.15@3805,3120 ; 3740.07,3120 ccw(c3740.07,3084.93) 3715.27,3109.73 cw(c3740.07,3084.93) 3740.07,3120 ; 3740.07,3120 cw(c3740.07,3155.07) 3715.27,3130.27 ccw(c3740.07,3155.07) 3740.07,3120 ; 3745.79,3120 ccw(c3745.79,3179.21) 3787.66,3137.34 cw(c3745.79,3179.21) 3745.79,3120 ; 3745.79,3120 cw(c3745.79,3060.79) 3787.66,3102.66 ccw(c3745.79,3060.79) 3745.79,3120 ; 3764.21,3120 ccw(c3764.21,3060.79) 3722.34,3102.66 cw(c3764.21,3060.79) 3764.21,3120 ; 3764.21,3120 cw(c3764.21,3179.21) 3722.34,3137.34 ccw(c3764.21,3179.21) 3764.21,3120 ; 3769.93,3120 ccw(c3769.93,3155.07) 3794.73,3130.27 cw(c3769.93,3155.07) 3769.93,3120 ; 3769.93,3120 cw(c3769.93,3084.93) 3794.73,3109.73 ccw(c3769.93,3084.93) 3769.93,3120
PC0: P5.1 P5.2 U1.8 | length 2939.6
  Top Layer w6: U1.8@2772.44,2772.56 U1.8@2792.87,2793
  Top Layer w10: 1811.38,2423.62 cw(c1776.05,2388.3) P5.1@1825.59,2381.87 ; P5.1@1815.68,2383.16 ccw(c1750.6,2391.6) 1797,2438 ; 1817,2418 cw(c1803.2,2404.2) P5.1@1819.51,2393.48 ; P5.1@1825.68,2409.32 cw(c1813.68,2397.31) P5.1@1827.86,2387.98 ; P5.1@1825.75,2409.25 cw(c1801.49,2385) P5.1@1835.51,2380.58 ; P5.1@1840,2380 1840,2395 1797,2438 ; v1@2025,3015 2025,2806 1949,2730 1820,2730 1797,2707 1797,2438 ; v1@2405,3020 2460,3020 2563.74,2916.26 2701.64,2916.26 2796.45,2821.45 2796.45,2798.29 2772.44,2774.27 U1.8@2772.44,2772.56 ; 2025,3003.8 ccw(c2003.8,3003.8) 2018.79,3018.79 cw(c2003.8,3003.8) 2025,3003.8 ; 2025,3003.8 cw(c2046.2,3003.8) 2031.21,3018.79 ccw(c2046.2,3003.8) 2025,3003.8 ; 1823.74,2411.26 ccw(c1840,2427.53) 1840,2404.53 cw(c1840,2427.53) 1823.74,2411.26 ; v1@2411.21,3031.21 ccw(c2438.27,3058.27) 2438.27,3020 cw(c2438.27,3058.27) v1@2411.21,3031.21
  Bottom Layer w10: P5.2@1740,2380 P5.1@1840,2380 ; v1(2025,3025) v1(2405,3025) ; 1775.07,2380 ccw(c1775.07,2344.93) 1750.27,2369.73 cw(c1775.07,2344.93) 1775.07,2380 ; 1775.07,2380 cw(c1775.07,2415.07) 1750.27,2390.27 ccw(c1775.07,2415.07) 1775.07,2380 ; 1780.79,2380 ccw(c1780.79,2439.21) 1822.66,2397.34 cw(c1780.79,2439.21) 1780.79,2380 ; 1780.79,2380 cw(c1780.79,2320.79) 1822.66,2362.66 ccw(c1780.79,2320.79) 1780.79,2380 ; 1799.21,2380 ccw(c1799.21,2320.79) 1757.34,2362.66 cw(c1799.21,2320.79) 1799.21,2380 ; 1799.21,2380 cw(c1799.21,2439.21) 1757.34,2397.34 ccw(c1799.21,2439.21) 1799.21,2380 ; 1804.93,2380 ccw(c1804.93,2415.07) 1829.73,2390.27 cw(c1804.93,2415.07) 1804.93,2380 ; 1804.93,2380 cw(c1804.93,2344.93) 1829.73,2369.73 ccw(c1804.93,2344.93) 1804.93,2380 ; 2046.2,3025 ccw(c2046.2,3003.8) 2031.21,3018.79 cw(c2046.2,3003.8) 2046.2,3025 ; 2046.2,3025 cw(c2046.2,3046.2) 2031.21,3031.21 ccw(c2046.2,3046.2) 2046.2,3025 ; 2383.8,3025 ccw(c2383.8,3046.2) 2398.79,3031.21 cw(c2383.8,3046.2) 2383.8,3025 ; 2383.8,3025 cw(c2383.8,3003.8) 2398.79,3018.79 ccw(c2383.8,3003.8) 2383.8,3025
PC1: P5.3 P5.4 U1.9 | length 2599.8
  Top Layer w10: P5.3@1834.64,2478.9 ccw(c1872.3,2486.61) 1862.35,2449.48 ; P5.3@1840,2480 2094,2226 2514.19,2226 2585,2296.81 2662.37,2296.81 2788.78,2423.22 2788.78,2560 2721.26,2627.52 2721.26,2691.84 2786.36,2756.94 U1.9@2786.36,2758.64 ; P5.3@1841.1,2485.36 cw(c1833.39,2447.7) 1870.52,2457.65 ; 1864.8,2455.2 ccw(c1840,2430.4) 1840,2465.47 cw(c1840,2430.4) 1864.8,2455.2 ; 1864.8,2455.2 cw(c1889.6,2480) 1854.53,2480 ccw(c1889.6,2480) 1864.8,2455.2 ; 1881.87,2438.13 ccw(c1840,2396.26) 1840,2455.47 cw(c1840,2396.26) 1881.87,2438.13 ; 1881.87,2438.13 cw(c1923.74,2480) 1864.53,2480 ccw(c1923.74,2480) 1881.87,2438.13
  Bottom Layer w10: P5.4@1740,2480 P5.3@1840,2480 ; 1775.07,2480 ccw(c1775.07,2444.93) 1750.27,2469.73 cw(c1775.07,2444.93) 1775.07,2480 ; 1775.07,2480 cw(c1775.07,2515.07) 1750.27,2490.27 ccw(c1775.07,2515.07) 1775.07,2480 ; 1780.79,2480 ccw(c1780.79,2539.21) 1822.66,2497.34 cw(c1780.79,2539.21) 1780.79,2480 ; 1780.79,2480 cw(c1780.79,2420.79) 1822.66,2462.66 ccw(c1780.79,2420.79) 1780.79,2480 ; 1799.21,2480 ccw(c1799.21,2420.79) 1757.34,2462.66 cw(c1799.21,2420.79) 1799.21,2480 ; 1799.21,2480 cw(c1799.21,2539.21) 1757.34,2497.34 ccw(c1799.21,2539.21) 1799.21,2480 ; 1804.93,2480 ccw(c1804.93,2515.07) 1829.73,2490.27 cw(c1804.93,2515.07) 1804.93,2480 ; 1804.93,2480 cw(c1804.93,2444.93) 1829.73,2469.73 ccw(c1804.93,2444.93) 1804.93,2480
PC2: P5.5 P5.6 U1.10 | length 2970.6
  Top Layer w10: 1709.48,2557.65 cw(c1746.61,2547.7) P5.6@1738.9,2585.36 ; 1717.65,2549.48 ccw(c1707.7,2586.61) P5.6@1745.36,2578.9 ; P5.6@1740,2580 1697,2537 1697,2360 1760,2297 1972,2297 2074,2195 2550,2195 2584,2229 2584,2230 2630,2276 2666.28,2276 2806.26,2415.98 2806.26,2583.74 2796.26,2593.74 2784.12,2593.74 2738.74,2639.12 2738.74,2681.48 2800.28,2743.02 U1.10@2800.28,2744.72 ; 1698.13,2538.13 ccw(c1656.26,2580) 1715.47,2580 cw(c1656.26,2580) 1698.13,2538.13 ; 1698.13,2538.13 cw(c1740,2496.26) 1740,2555.47 ccw(c1740,2496.26) 1698.13,2538.13 ; 1715.2,2555.2 ccw(c1690.4,2580) 1725.47,2580 cw(c1690.4,2580) 1715.2,2555.2 ; 1715.2,2555.2 cw(c1740,2530.4) 1740,2565.47 ccw(c1740,2530.4) 1715.2,2555.2
  Bottom Layer w10: P5.6@1740,2580 P5.5@1840,2580 ; 1775.07,2580 ccw(c1775.07,2544.93) 1750.27,2569.73 cw(c1775.07,2544.93) 1775.07,2580 ; 1775.07,2580 cw(c1775.07,2615.07) 1750.27,2590.27 ccw(c1775.07,2615.07) 1775.07,2580 ; 1780.79,2580 ccw(c1780.79,2639.21) 1822.66,2597.34 cw(c1780.79,2639.21) 1780.79,2580 ; 1780.79,2580 cw(c1780.79,2520.79) 1822.66,2562.66 ccw(c1780.79,2520.79) 1780.79,2580 ; 1799.21,2580 ccw(c1799.21,2520.79) 1757.34,2562.66 cw(c1799.21,2520.79) 1799.21,2580 ; 1799.21,2580 cw(c1799.21,2639.21) 1757.34,2597.34 ccw(c1799.21,2639.21) 1799.21,2580 ; 1804.93,2580 ccw(c1804.93,2615.07) 1829.73,2590.27 cw(c1804.93,2615.07) 1804.93,2580 ; 1804.93,2580 cw(c1804.93,2544.93) 1829.73,2569.73 ccw(c1804.93,2544.93) 1804.93,2580
PC3: P5.7 P5.8 U1.11 | length 1977.8
  Top Layer w6: U1.11@2814.2,2730.8 U1.11@2814.2,2727.69 ; U1.11@2814.2,2727.69 2812.78,2727.69 U1.11@2814.2,2727.69
  Top Layer w10: v1(2765,2660) 2765,2681.61 U1.11@2814.2,2730.8 ; 2765,2681.2 ccw(c2786.2,2681.2) 2771.21,2666.21 cw(c2786.2,2681.2) 2765,2681.2 ; 2765,2681.2 cw(c2743.8,2681.2) 2758.79,2666.21 ccw(c2743.8,2681.2) 2765,2681.2
  Bottom Layer w10: P5.8@1740,2680 P5.7@1840,2680 1881,2680 ; v1(2765,2660) 2712.48,2712.52 1913.52,2712.52 1881,2680 ; 1775.07,2680 ccw(c1775.07,2644.93) 1750.27,2669.73 cw(c1775.07,2644.93) 1775.07,2680 ; 1775.07,2680 cw(c1775.07,2715.07) 1750.27,2690.27 ccw(c1775.07,2715.07) 1775.07,2680 ; 1780.79,2680 ccw(c1780.79,2739.21) 1822.66,2697.34 cw(c1780.79,2739.21) 1780.79,2680 ; 1780.79,2680 cw(c1780.79,2620.79) 1822.66,2662.66 ccw(c1780.79,2620.79) 1780.79,2680 ; 1799.21,2680 ccw(c1799.21,2620.79) 1757.34,2662.66 cw(c1799.21,2620.79) 1799.21,2680 ; 1799.21,2680 cw(c1799.21,2739.21) 1757.34,2697.34 ccw(c1799.21,2739.21) 1799.21,2680 ; 1804.93,2680 ccw(c1804.93,2715.07) 1829.73,2690.27 cw(c1804.93,2715.07) 1804.93,2680 ; 1804.93,2680 cw(c1804.93,2644.93) 1829.73,2669.73 ccw(c1804.93,2644.93) 1804.93,2680 ; 1881,2680 ccw(c1881,2658) 1861.61,2668.4 cw(c1881,2658) 1881,2680 ; 1881,2680 cw(c1881,2702) 1861.61,2691.6 ccw(c1881,2702) 1881,2680 ; 2750.01,2674.99 ccw(c2765,2689.98) 2765,2668.78 cw(c2765,2689.98) 2750.01,2674.99 ; 2750.01,2674.99 cw(c2735.02,2660) 2756.22,2660 ccw(c2735.02,2660) 2750.01,2674.99
PC5: J3.1 K3.2 P5.11 P5.12 U1.25 | length 7362.5
  Top Layer w6: U1.25@3080.07,2785.07 U1.25@3092.58,2772.56
  Top Layer w10: v1(3000,2875) 3000,2865.15 U1.25@3080.07,2785.07 ; v1@3000.58,2876.07 cw(c2988.83,2854.48) 3012.57,2860.84 ; J3.1@3080,1380 3066.26,1393.74 3066.26,1534.26 3082,1550 3082,2279 3113,2310 3113,2595 3165,2647 3165,2700.15 U1.25@3092.58,2772.56 ; v1@2998.78,2875 ccw(c3019.62,2875) 3004.88,2860.27 cw(c3019.62,2875) v1@2998.78,2875 ; v1@3008.78,2875 ccw(c3053.76,2875) 3021.95,2843.19 cw(c3053.76,2875) v1@3008.78,2875 ; J3.1@3045.25,1404.75 ccw(c2994.53,1455.47) 3066.26,1455.47 cw(c2994.53,1455.47) J3.1@3045.25,1404.75 ; J3.1@3052.32,1397.68 ccw(c3018.67,1431.33) 3066.26,1431.33 cw(c3018.67,1431.33) J3.1@3052.32,1397.68 ; 3066.26,1425.24 ccw(c3115.24,1425.24) 3080.61,1390.61 cw(c3115.24,1425.24) 3066.26,1425.24 ; 3066.26,1449.38 ccw(c3139.38,1449.38) 3087.68,1397.68 cw(c3139.38,1449.38) 3066.26,1449.38 ; 3066.26,1473.53 ccw(c3163.53,1473.53) 3094.75,1404.75 cw(c3163.53,1473.53) 3066.26,1473.53
  Bottom Layer w10: P5.12@1740,2880 P5.11@1840,2880 2066.22,2880 2141.22,2955 2555,2955 2618.74,2891.26 2618.74,2877.86 2620,2876.6 2620,2870 2645,2845 2865,2845 2895,2875 v1(3000,2875) ; J3.1@3080,1380 2955,1380 2891.48,1443.52 2782.52,1443.52 2759,1420 2759,1189 2927,1021 3657,1021 3816,1180 K3.2@4020,1180 ; 1775.07,2880 ccw(c1775.07,2844.93) 1750.27,2869.73 cw(c1775.07,2844.93) 1775.07,2880 ; 1775.07,2880 cw(c1775.07,2915.07) 1750.27,2890.27 ccw(c1775.07,2915.07) 1775.07,2880 ; 1780.79,2880 ccw(c1780.79,2939.21) 1822.66,2897.34 cw(c1780.79,2939.21) 1780.79,2880 ; 1780.79,2880 cw(c1780.79,2820.79) 1822.66,2862.66 ccw(c1780.79,2820.79) 1780.79,2880 ; 1799.21,2880 ccw(c1799.21,2820.79) 1757.34,2862.66 cw(c1799.21,2820.79) 1799.21,2880 ; 1799.21,2880 cw(c1799.21,2939.21) 1757.34,2897.34 ccw(c1799.21,2939.21) 1799.21,2880 ; 1804.93,2880 ccw(c1804.93,2915.07) 1829.73,2890.27 cw(c1804.93,2915.07) 1804.93,2880 ; 1804.93,2880 cw(c1804.93,2844.93) 1829.73,2869.73 ccw(c1804.93,2844.93) 1804.93,2880 ; 1875.07,2880 ccw(c1875.07,2844.93) 1850.27,2869.73 cw(c1875.07,2844.93) 1875.07,2880 ; 1875.07,2880 cw(c1875.07,2915.07) 1850.27,2890.27 ccw(c1875.07,2915.07) 1875.07,2880 ; 1899.21,2880 ccw(c1899.21,2820.79) 1857.34,2862.66 cw(c1899.21,2820.79) 1899.21,2880 ; 1899.21,2880 cw(c1899.21,2939.21) 1857.34,2897.34 ccw(c1899.21,2939.21) 1899.21,2880 ; 2978.8,2875 ccw(c2978.8,2896.2) 2993.79,2881.21 cw(c2978.8,2896.2) 2978.8,2875 ; 2978.8,2875 cw(c2978.8,2853.8) 2993.79,2868.79 ccw(c2978.8,2853.8) 2978.8,2875 ; 2985.5,1380 ccw(c2985.5,1464.5) 3045.25,1404.75 cw(c2985.5,1464.5) 2985.5,1380 ; 2985.5,1380 cw(c2985.5,1295.5) 3045.25,1355.25 ccw(c2985.5,1295.5) 2985.5,1380 ; 3009.64,1380 ccw(c3009.64,1440.36) 3052.32,1397.68 cw(c3009.64,1440.36) 3009.64,1380 ; 3009.64,1380 cw(c3009.64,1319.64) 3052.32,1362.32 ccw(c3009.64,1319.64) 3009.64,1380 ; 3953.54,1180 ccw(c3953.54,1246.46) 4000.54,1199.46 cw(c3953.54,1246.46) 3953.54,1180 ; 3953.54,1180 cw(c3953.54,1113.54) 4000.54,1160.54 ccw(c3953.54,1113.54) 3953.54,1180 ; 3977.68,1180 ccw(c3977.68,1222.32) 4007.61,1192.39 cw(c3977.68,1222.32) 3977.68,1180 ; 3977.68,1180 cw(c3977.68,1137.68) 4007.61,1167.61 ccw(c3977.68,1137.68) 3977.68,1180
PC7: Designator12.5 Designator12.6 U1.38 | length 2200.7
  Top Layer w10: Designator12.6@2002.66,3522.34 ccw(c1960.79,3564.21) 2020,3564.21 ccw(c2079.21,3564.21) Designator12.6@2037.34,3522.34 ; Designator12.5@2002.66,3587.66 cw(c1960.79,3545.79) 2020,3545.79 cw(c2079.21,3545.79) Designator12.5@2037.34,3587.66 ; Designator12.6@2009.73,3515.27 ccw(c1984.93,3540.07) 2020,3540.07 ccw(c2055.07,3540.07) Designator12.6@2030.27,3515.27 ; Designator12.5@2009.73,3594.73 cw(c1984.93,3569.93) 2020,3569.93 cw(c2055.07,3569.93) Designator12.5@2030.27,3594.73 ; Designator12.6@2020,3505 Designator12.5@2020,3605 ; v1@2250,3255 2425,3080 2465,3080 2568.74,2976.26 2620.88,2976.26 v1(2646.07,2951.07) ; v1@2253.78,3265 ccw(c2287.05,3265) 2263.52,3241.48 ; v1@2637.29,2951.07 ccw(c2616.09,2951.07) 2631.08,2966.06 ccw(c2646.07,2981.04) v1@2646.07,2959.85 ; v1(2940,2975) 2947.86,2975 2964.3,2958.57 ; v1@2941.21,2966.3 cw(c2944.98,2939.25) 2964.3,2958.57 ; U1.38@3120.42,3037.03 3078.39,2995 3030.17,2995 2993.74,2958.57 2964.3,2958.57
  Bottom Layer w10: Designator12.6@2020,3480.47 cw(c2020,3433.33) 2053.34,3466.66 ; Designator12.6@2020,3505 2027.5,3497.5 2027.5,3492.5 v1@2250,3270 ; Designator12.6@2034.53,3505 ccw(c2081.67,3505) 2048.34,3471.66 ; Designator12.6@2044.53,3505 ccw(c2115.81,3505) 2065.41,3454.59 ; 2222.94,3297.06 cw(c2190.88,3265) v1@2236.22,3265 ; 2240.01,3279.99 cw(c2225.02,3265) v1@2246.22,3265 ; v1@2645.21,2950.21 ccw(c2665.17,2970.17) 2665.17,2941.94 ; v1(2646.07,2951.07) 2655.2,2941.94 2891.66,2941.94 2924.72,2975 ; v1@2652.28,2957.28 ccw(c2689.31,2994.31) 2689.31,2941.94 ; 2898.93,2949.21 cw(c2940,2908.14) v1@2940,2966.22 ; 2916,2966.28 cw(c2940,2942.28) v1@2940,2976.22 ; v1@2932.41,2970.58 ccw(c2924.72,2966.1) 2924.72,2975 ; v1@2932.41,2979.42 cw(c2924.72,2983.9) 2924.72,2975 ; v1(2940,2975) 2924.72,2975
  other v1: 2245,3265
PC8: Designator12.3 Designator12.4 R19.2 SD1.7 U1.39 | length 3843.2
  Top Layer w10: R19.2@1450.43,3445 1509,3445 v1@1519,3435 ; v1@1970,3386.22 cw(c1970,3365.02) 1984.99,3380.01 ; v1@1970,3403.78 ccw(c1970,3424.98) 1984.99,3409.99 ccw(c1999.98,3395) 1978.78,3395 ccw(c1999.98,3395) 1984.99,3380.01 ; Designator12.4@2095.47,3505 cw(c2036.26,3505) 2078.13,3463.13 cw(c2120,3421.26) Designator12.4@2120,3480.47 ; Designator12.4@2102.66,3522.34 ccw(c2060.79,3564.21) 2120,3564.21 ccw(c2179.21,3564.21) Designator12.4@2137.34,3522.34 ; Designator12.3@2102.66,3587.66 cw(c2060.79,3545.79) 2120,3545.79 cw(c2179.21,3545.79) Designator12.3@2137.34,3587.66 ; Designator12.4@2105.47,3505 cw(c2070.4,3505) 2095.2,3480.2 cw(c2120,3455.4) Designator12.4@2120,3490.47 ; Designator12.4@2109.73,3515.27 ccw(c2084.93,3540.07) 2120,3540.07 ccw(c2155.07,3540.07) Designator12.4@2130.27,3515.27 ; Designator12.3@2109.73,3594.73 cw(c2084.93,3569.93) 2120,3569.93 cw(c2155.07,3569.93) Designator12.3@2130.27,3594.73 ; Designator12.3@2120,3605 Designator12.4@2120,3505 2045,3430 2005,3430 v1(1970,3395) 1985,3380 ; v1@2318.79,3373.79 ccw(c2303.8,3358.8) 2303.8,3380 ccw(c2303.8,3401.2) v1@2318.79,3386.21 ; v1(2325,3380) 1985,3380 ; U1.39@3106.5,3050.95 3108.21,3050.95 3132.23,3074.97 v1@3170.97,3074.97 ; 3153.73,3074.97 ccw(c3153.73,3096.27) v1@3168.79,3081.21 ; 3153.88,3074.97 cw(c3153.88,3053.88) v1@3168.79,3068.79 ; 1495.39,3445 ccw(c1495.39,3400.04) 1463.6,3431.83 cw(c1495.39,3400.04) 1495.39,3445 ; 1495.39,3445 cw(c1495.39,3489.96) 1463.6,3458.17 ccw(c1495.39,3489.96) 1495.39,3445 ; 1476.73,3445 cw(c1476.73,3406.73) 1503.79,3433.79 ccw(c1476.73,3406.73) 1476.73,3445
  Bottom Layer w10: v1@1508.85,3439.59 ccw(c1525.86,3445.67) 1521.18,3428.22 ; v1@1514.14,3432.26 cw(c1518.41,3424.26) 1526.26,3428.79 ; SD1.7@1539.06,3427.41 cw(c1540.46,3411.83) SD1.7@1553.28,3420.78 ; SD1.7@1586.76,3420.84 cw(c1607.13,3404.67) 1604.16,3430.51 ; 1951.48,3418.52 cw(c1927.95,3395) v1@1961.22,3395 ; v1(1970,3395) 1970,3400 1930,3440 1623,3440 ; v1@2325,3385.3 2570.96,3385.3 2596.26,3360 2596.26,3154.23 2687.75,3062.74 2832.52,3062.74 2850,3045.26 2911.24,3045.26 2940,3074.02 3170.02,3074.02 v1@3173,3077 ; v1@2331.21,3373.79 cw(c2358.99,3346.01) 2358.99,3385.3 ; 3151.43,3074.02 ccw(c3151.43,3098.57) v1@3168.79,3081.21 ; 3156.18,3074.02 cw(c3156.18,3056.18) v1@3168.79,3068.79 ; v1@1512.27,3431.52 cw(c1517.91,3410.49) 1528.8,3429.34 ; v1@1512.27,3431.52 cw(c1517.91,3410.49) 1528.8,3429.34 ; v1@1512.27,3431.52 cw(c1517.91,3410.49) 1528.8,3429.34 ; v1@1518.48,3442.27 ccw(c1538.39,3447.61) 1528.09,3429.75 ; v1@1518.48,3442.27 ccw(c1538.39,3447.61) 1528.09,3429.75 ; v1@1518.48,3442.27 ccw(c1538.39,3447.61) 1528.09,3429.75 ; v1@1519,3435 ccw(c1539.36,3455.36) 1549.26,3428.32 cw(c1539.36,3455.36) v1@1519,3435 ; v1@1519,3435 1533.92,3420.08 ; 1533.92,3420.08 ccw(c1533.92,3434.89) 1545.45,3425.59 cw(c1533.92,3434.89) 1533.92,3420.08 ; 1533.92,3420.08 cw(c1533.92,3405.27) 1545.45,3414.57 ccw(c1533.92,3405.27) 1533.92,3420.08 ; 1533.92,3420.08 SD1.7@1570,3420.08 1603.08,3420.08 ; 1603.08,3420.08 ccw(c1603.08,3411.03) 1595.28,3415.62 cw(c1603.08,3411.03) 1603.08,3420.08 ; 1603.08,3420.08 cw(c1603.08,3429.13) 1595.28,3424.54 ccw(c1603.08,3429.13) 1603.08,3420.08 ; 1603.08,3420.08 1623,3440 ; 1623,3440 cw(c1594.84,3468.16) 1589,3428.76 ccw(c1594.84,3468.16) 1623,3440 ; v1@1510,3431.22 cw(c1510,3400.37) 1531.82,3422.18 ccw(c1510,3400.37) v1@1510,3431.22 ; v1@1518.78,3440 ccw(c1530.32,3440) 1522.16,3431.84 cw(c1530.32,3440) v1@1518.78,3440 ; 1530.07,3423.93 ccw(c1545.3,3439.15) 1552.7,3418.93 cw(c1545.3,3439.15) 1530.07,3423.93 ; SD1.7@1587.54,3418.87 ccw(c1591.21,3443.68) 1608.95,3425.95 cw(c1591.21,3443.68) SD1.7@1587.54,3418.87
  other v1: 3175,3075 1510,3440